# Altium PCB PCB_幻彩灯带_2021-05-29.pcbdoc
Units mil, origin at the board's own origin, x right, y up, seen from the top; angles counter-clockwise.
Board outline 4440.49 x 2977.99 mil, 2 copper layers (Top Layer, Bottom Layer); 36 components, 34 nets, 131 pads, 78 vias.
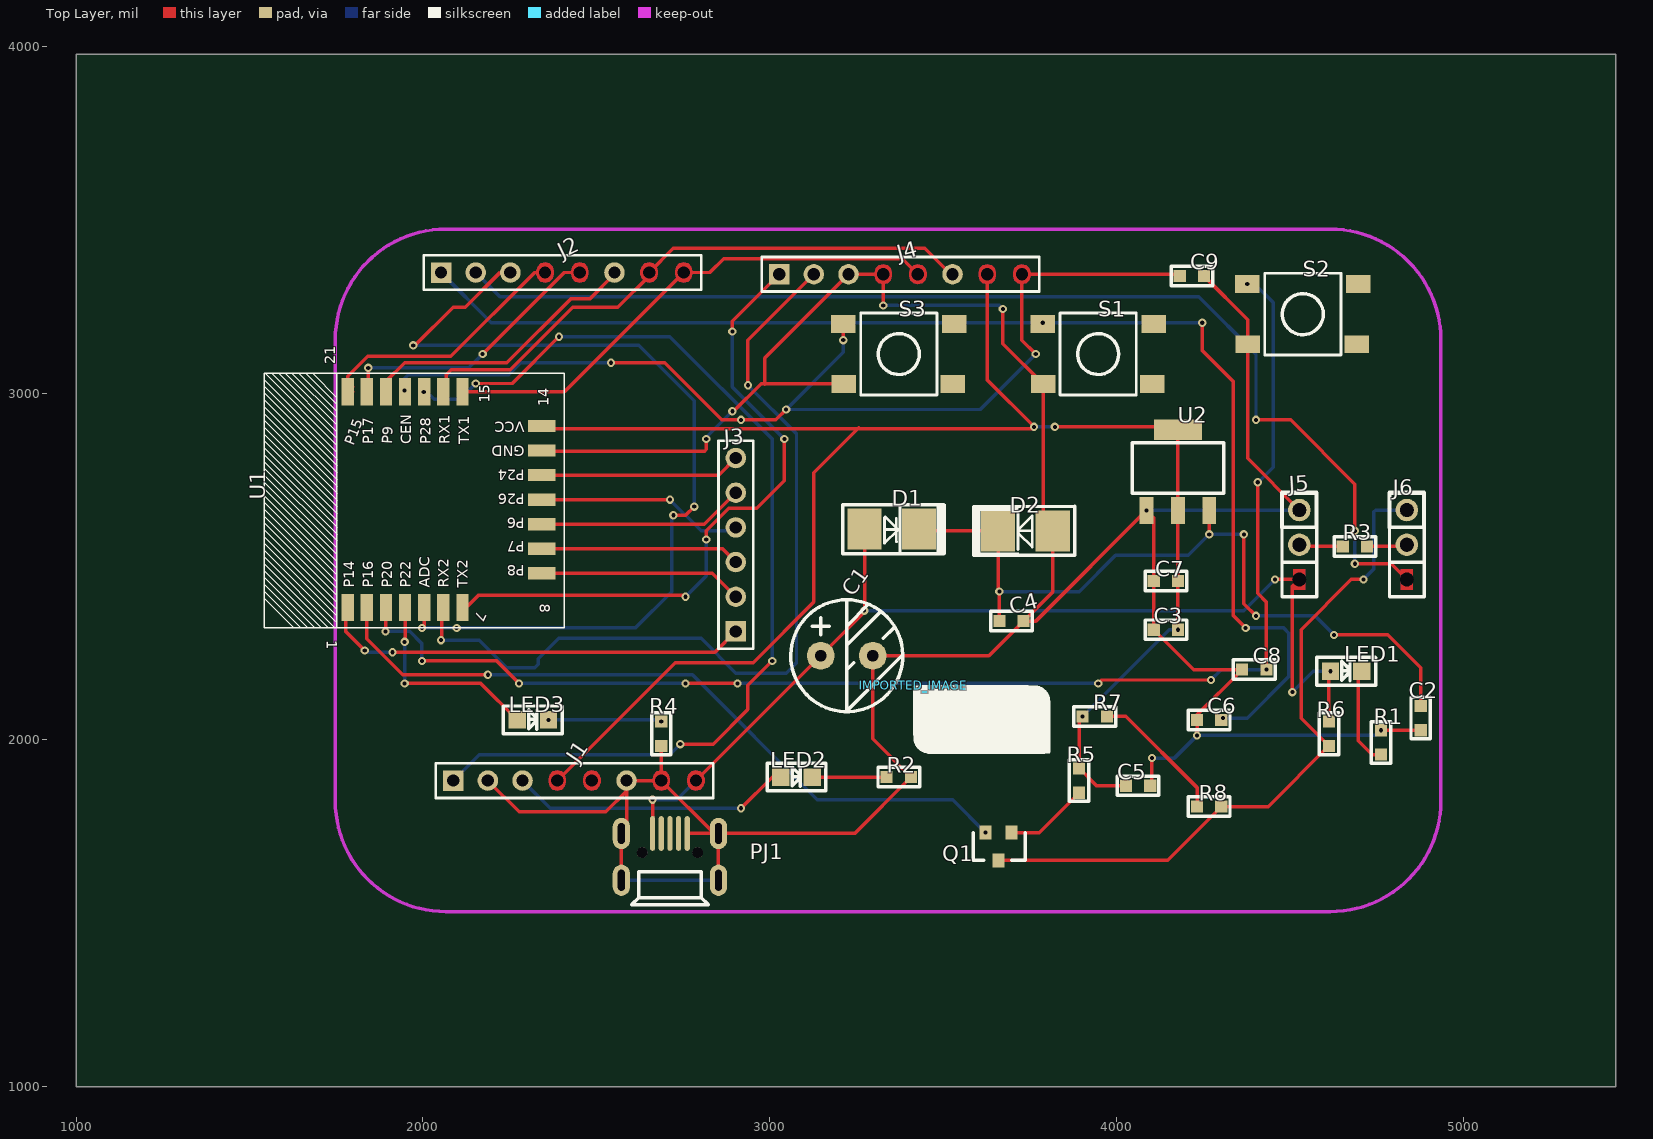
[diagram p0: Top Layer view]
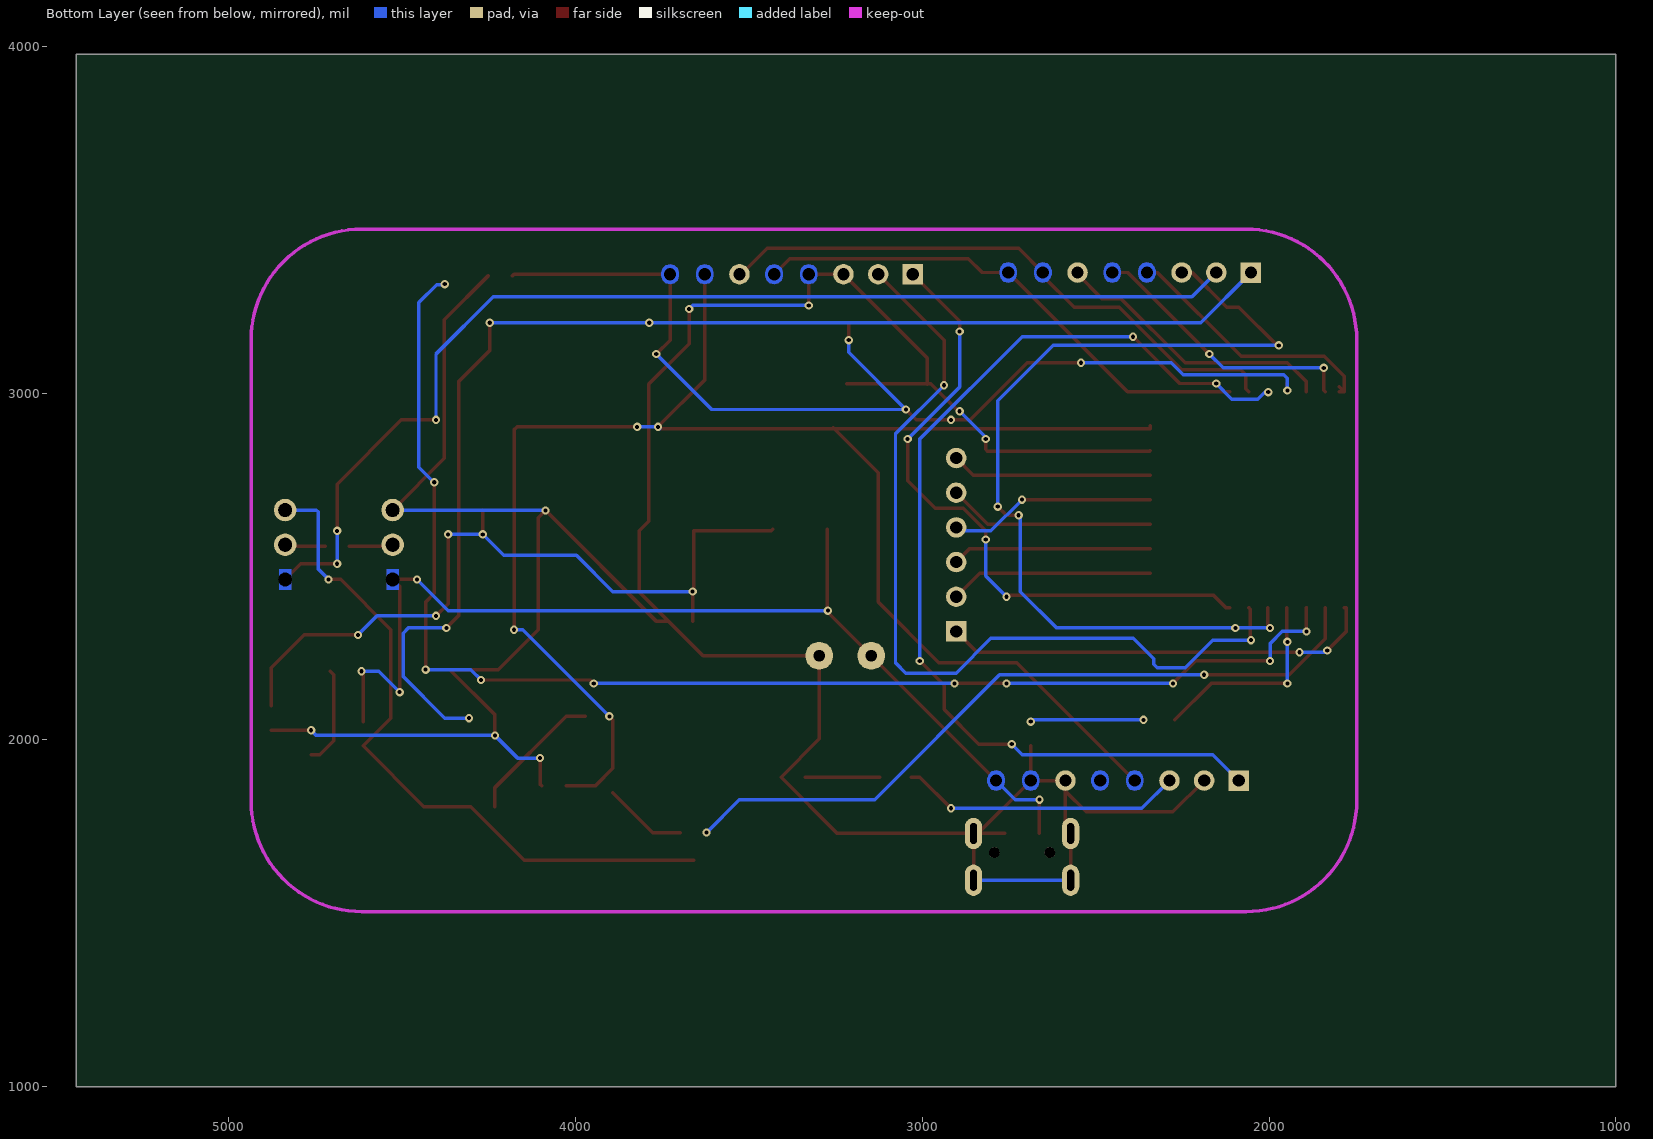
[diagram p1: Bottom Layer view, seen from below]

## Layer stack, top to bottom
Top Layer: signal copper (thickness not stored)
Dielectric: dielectric 12.6, FR-4, Dk 4.8
Bottom Layer: signal copper (thickness not stored)

## Board outline
5440.49,1000 1000,1000 1000,3977.99 5440.49,3977.99

## Components (designator, comment, footprint, x,y, rotation, side; value= is the part's Value field where it differs from the comment)
C1 "220uF±20%/16V" CD0.15 3222.5,2242.99 r0 top
C2 "22uF±20%/16V" C0603 4877.5,2097.99 r270 top
C3 "22uF±20%/16V" C0603 4177.5,2317.99 r180 top
C4 "0.1uF±20%/50V" C0603 3662.5,2342.99 r0 top
C5 "0.1uF±20%/50V" C0603 4027.5,1867.99 r0 top
C6 "0.1uF±20%/16V" C0603 4232.5,2057.99 r0 top
C7 "0.1uF±20%/16V" C0603 4107.5,2457.99 r0 top
C8 "0.1uF±20%/16V" C0603 4362.5,2202.99 r0 top
C9 "0.1uF±20%/16V" C0603 4182.5,3337.99 r0 top
D1 "SS210" SMA(DO-214AC) 3352.5,2607.99 r0 top
D2 "SMBJ05CA" SMB(DO-214AA) 3737.5,2602.99 r180 top
IMPORTED_IMAGE "IMPORTED_IMAGE" IMPORTED_IMAGE 3414.6,2157.49 r0 top
J1 "CON8" HDR1X8Z 2087.5,1882.99 r0 top
J2 "CON8" HDR1X8Z 2052.5,3347.99 r0 top
J3 "CON6" HDR1X6Z 2902.5,2312.99 r90 top
J4 "CON8" HDR1X8Z 3027.5,3342.99 r0 top
J5 "KF301-3P" "SIP3 - 2.54" 4527.5,2462.99 r90 top
J6 "KF301-3P" "SIP3 - 2.54" 4837.5,2462.99 r90 top
LED1 "LED" LED0805_1 4617.5,2197.99 r0 top
LED2 "LED" LED0805_1 3032.5,1892.99 r0 top
LED3 "LED" LED0805_1 2272.5,2057.99 r0 top
PJ1 "MCR_USB" MICRO_USB-NEW-16.12.12 2712.5,1662.99 r180 top
Q1 "S8050" SOT-23-NPN 3697.5,1732.99 r180 top
R1 "1R±5%" R0603 4762.5,1957.99 r90 top
R2 "1K±5%" R0603 3407.5,1892.99 r180 top
R3 "1R±5%" R0603 4722.5,2557.99 r180 top
R4 "1K±5%" R0603 2687.5,2052.99 r270 top
R5 "2K±5%" R0603 3892.5,1917.99 r270 top
R6 "2K±5%" R0603 4612.5,2052.99 r270 top
R7 "2K±5%" R0603 3902.5,2067.99 r0 top
R8 "NC/0R" R0603 4232.5,1807.99 r0 top
S1 "KEY_SW2" KEY4-SMD 3947.5,3112.99 r0 top
S2 "KEY_SW2" KEY4-SMD 4537.5,3227.99 r0 top
S3 "KEY_SW2" KEY4-SMD 3372.5,3112.99 r0 top
U1 "WIFI_BLE_CBU" WIFI_BLE_CBU 2342.5,2692.99 r90 top
U2 "GM1117-3.3ST3T" SOT-223 4177.5,2777.99 r0 top

## Footprints (in the part's own frame and the unit in brackets; to place one, negate y for a bottom-side part, rotate by r counter-clockwise, add the part's x,y. Pads: shape width x height; smd on the part's side, far side on the other; paste and mask are expansions set on the pad)
C0603 [mil]
  rect 35x35 smd: 1(0,0) 2(70,0)
  silkscreen extent -25,-28 95,28
CD0.15 [mil]
  round 80 hole 32 slot 32.2 at 0 deg: 1(-75,0) 2(75,0)
  silkscreen extent -161,-161 161,161
HDR1X6Z [mm]
  rect 1.5x1.5 hole 0.9: 1(0,0)
  round 1.5 hole 0.9: 2(2.54,0) 3(5.08,0) 4(7.62,0) 5(10.16,0) 6(12.7,0)
  silkscreen extent -1.27,-1.27 13.97,1.27
HDR1X8Z [mm]
  rect 1.5x1.5 hole 0.9: 1(0,0)
  round 1.5 hole 0.9: 2(2.54,0) 3(5.08,0) 6(12.7,0)
  round 0 hole 0.9: 4(7.62,0) 5(10.16,0) 7(15.24,0) 8(17.78,0)
  Top Layer region: 18.415,-0.115 18.33,-0.433 18.097,-0.665 17.78,-0.75 17.462,-0.665 17.23,-0.433 17.145,-0.115 17.145,0.115 17.23,0.432 17.462,0.665 17.78,0.75 18.097,0.665 18.33,0.432 18.415,0.115
  Top Layer region: 15.875,-0.115 15.79,-0.433 15.557,-0.665 15.24,-0.75 14.922,-0.665 14.69,-0.433 14.605,-0.115 14.605,0.115 14.69,0.432 14.922,0.665 15.24,0.75 15.557,0.665 15.79,0.432 15.875,0.115
  Top Layer region: 10.795,-0.115 10.71,-0.433 10.477,-0.665 10.16,-0.75 9.842,-0.665 9.61,-0.433 9.525,-0.115 9.525,0.115 9.61,0.432 9.842,0.665 10.16,0.75 10.477,0.665 10.71,0.432 10.795,0.115
  Top Layer region: 8.255,-0.115 8.17,-0.433 7.937,-0.665 7.62,-0.75 7.302,-0.665 7.07,-0.433 6.985,-0.115 6.985,0.115 7.07,0.432 7.302,0.665 7.62,0.75 7.937,0.665 8.17,0.432 8.255,0.115
  Bottom Layer region: 18.415,-0.115 18.33,-0.433 18.097,-0.665 17.78,-0.75 17.462,-0.665 17.23,-0.433 17.145,-0.115 17.145,0.115 17.23,0.432 17.462,0.665 17.78,0.75 18.097,0.665 18.33,0.432 18.415,0.115
  Bottom Layer region: 15.875,-0.115 15.79,-0.433 15.557,-0.665 15.24,-0.75 14.922,-0.665 14.69,-0.433 14.605,-0.115 14.605,0.115 14.69,0.432 14.922,0.665 15.24,0.75 15.557,0.665 15.79,0.432 15.875,0.115
  Bottom Layer region: 10.795,-0.115 10.71,-0.433 10.477,-0.665 10.16,-0.75 9.842,-0.665 9.61,-0.433 9.525,-0.115 9.525,0.115 9.61,0.432 9.842,0.665 10.16,0.75 10.477,0.665 10.71,0.432 10.795,0.115
  Bottom Layer region: 8.255,-0.115 8.17,-0.433 7.937,-0.665 7.62,-0.75 7.302,-0.665 7.07,-0.433 6.985,-0.115 6.985,0.115 7.07,0.432 7.302,0.665 7.62,0.75 7.937,0.665 8.17,0.432 8.255,0.115
  silkscreen extent -1.27,-1.27 19.05,1.27
IMPORTED_IMAGE [mil]
  silkscreen extent 0,-197 395,0
KEY4-SMD [mm]
  rect 1.8x1.3 smd: 1(-4.035,-2.2) 2(-4.065,2.2) 3(4.065,2.2) 4(3.965,-2.2)
  silkscreen extent -2.79,-3 2.79,3
LED0805_1 [mil]
  rect 50x50 smd: 1(0,0) 2(90,0)
  silkscreen extent -40,-40 130,40
MICRO_USB-NEW-16.12.12 [mil]
  oval 15x100 smd: 1(-50,-67.5) 2(-25,-67.5) 3(0,-67.5) 4(25,-67.5) 5(50,-67.5)
  oval 50x90 hole 20 slot 60 at 90 deg: 6(-140,-67.5) 7(-140,67.5) 8(140,67.5) 9(140,-67.5)
  round 30 hole 30 slot 30.2 at 0 deg unplated: ""(-80,-12.5) ""(80,-12.5)
  silkscreen extent -110,42 110,138
R0603 [mil]
  rect 35x35 smd: 1(0,0) 2(70,0)
  silkscreen extent -25,-28 95,28
"SIP3 - 2.54" [mil]
  round 0 hole 39.37 slot 39.57 at 90 deg: 1(0,0)
  round 65 hole 39.37 slot 39.57 at 0 deg: 2(100,0) 3(200,0)
  Top Layer region: 30.03,17.44 -30.03,17.44 -30.03,-17.44 30.03,-17.44
  Bottom Layer region: 30.03,17.44 -30.03,17.44 -30.03,-17.44 30.03,-17.44
  silkscreen extent -50,-50 250,50
SMA(DO-214AC) [mm]
  rect 2.5x3 smd: 1(-2,0) 2(2,0)
  silkscreen extent -3.6,-1.84 3.94,1.83
SMB(DO-214AA) [mm]
  rect 2.5x3 smd: 1(-2,0) 2(2,0)
  silkscreen extent -3.6,-1.8 3.91,1.82
SOT-23-NPN [mil]
  rect 35x40 smd: 1(75,0) 2(0,0) 3(38,80)
  silkscreen extent -40,0 110,80
SOT-223 [mm]
  rect 1x2 smd: 1(-2.3,-2.95) 2(0,-2.95) 3(2.3,-2.95)
  rect 3.5x1.5 smd: 2(0,2.95)
  silkscreen extent -3.35,-1.71 3.35,1.99
WIFI_BLE_CBU [mm]
  rect 2x0.9 smd: 1(-7.9,14.2) 2(-7.9,12.8) 3(-7.9,11.4) 4(-7.9,10) 5(-7.9,8.6) 6(-7.9,7.2) 7(-7.9,5.8) 15(7.9,5.8) 16(7.9,7.2) 17(7.9,8.6) 18(7.9,10) 19(7.9,11.4) 20(7.9,12.8) 21(7.9,14.2)
  rect 0.9x2 smd: 8(-5.4,0) 9(-3.6,0) 10(-1.8,0) 11(0,0) 12(1.8,0) 13(3.6,0) 14(5.4,0)
  silkscreen extent -9.4,-1.65 9.28,20.33

## Via types
v1: diameter 24, hole 12, Top Layer to Bottom Layer, 78 vias

## Nets (pads, with @x,y where several pads share a name; then routed paths per layer and width w, separated by ;. In a path a pad name is that pad's centre, name@x,y a point inside that pad or via, vN(x,y) a via of type N, cw(c..) or ccw(c..) an arc to the next point about the centre after c; other vN are vias at no path point)
+3.3V: C3.1 C5.1 C7.2 J1.4 J4.7 R5.1 R7.1 U1.14 U2.2 | length 5128.5
  Top Layer w10: U1.14 2342.5,2897.99 3762.5,2897.99 v1(3762.5,2902.99) 3627.5,3037.99 J4.7 ; J1.4 2727.5,2222.99 2952.5,2222.99 3127.5,2397.99 3127.5,2770.79 3257.3,2900.59 ; v1(3822.5,2902.99) 4168.64,2902.99 4177.5,2894.13 4177.5,2661.85 C7.2 v1(4177.5,2317.99) ; v1(3902.5,2067.99) 3892.5,2057.99 R5.1 3942.5,1867.99 C5.1
  Bottom Layer w10: v1@3757.5,2897.99 v1(3762.5,2902.99) v1(3822.5,2902.99) ; v1(3902.5,2067.99) 4152.5,2317.99 v1(4177.5,2317.99)
+5V: C1.1 D1.1 J1.8 J5.1 LED1.1 PJ1.5 R6.1 | length 3074.2
  Top Layer w10: PJ1.5 v1(2662.5,1827.99) ; v1(2787.5,1882.99) C1.1 3273.76,2369.25 D1.1 ; v1(4457.5,2462.99) J5.1 4507.5,2442.99 v1(4507.5,2137.99) ; R6.1 4612.5,2192.99 v1(4617.5,2197.99)
  Bottom Layer w10: v1(2662.5,1827.99) 2732.5,1827.99 v1(2787.5,1882.99) ; v1(3272.5,2372.99) 4367.5,2372.99 v1(4457.5,2462.99) ; v1(4507.5,2137.99) 4567.5,2197.99 v1@4612.5,2197.99
ADC: J2.3 U1.5 | length 2665.8
  Top Layer w10: v1(1972.5,3137.99) 1977.5,3137.99 2087.5,3247.99 2122.5,3247.99 2222.5,3347.99 J2.3 ; v1(1997.5,2322.99) 2003.92,2329.41 U1.5 ; v1(2722.5,2647.99) 2757.5,2647.99 v1(2782.5,2672.99)
  Bottom Layer w10: v1(1972.5,3137.99) 2622.5,3137.99 2782.5,2977.99 v1(2782.5,2672.99) ; v1(1997.5,2322.99) v1(2097.5,2322.99) 2612.5,2322.99 2717.5,2427.99 2717.5,2642.99 v1(2722.5,2647.99)
D1_2: C2.1 C4.1 D1.2 D2.2 U2.3 | length 2230.2
  Top Layer w10: D1.2 3436.24,2602.99 D2.2 3658.76,2431.73 v1(3662.5,2427.99) C4.1 ; v1(4267.5,2592.99) 4268.05,2593.54 U2.3@4268.05,2661.85 ; v1(4367.5,2592.99) 4367.5,2392.99 v1(4402.5,2357.99) ; v1(4627.5,2302.99) 4782.5,2302.99 4877.5,2207.99 C2.1
  Bottom Layer w10: v1(3662.5,2427.99) 3892.5,2427.99 3997.5,2532.99 4207.5,2532.99 v1(4267.5,2592.99) v1(4367.5,2592.99) ; v1(4402.5,2357.99) 4572.5,2357.99 v1(4627.5,2302.99)
GND: C1.2 C2.2 C3.2 C4.2 C5.2 C6.1 C7.1 C8.1 C9.2 D2.1 J1.2 J1.6 J1.7 J4.3 J4.4 J5.3 PJ1.1 PJ1.6 PJ1.7 PJ1.8 PJ1.9 R1.2 R2.1 R4.2 S1.1 S2.1 S3.1 U1.13 U2.1 | length 9641.3
  Top Layer w10: J1.2 2277.5,1792.99 2527.5,1792.99 2587.5,1852.99 J1.6 ; U1.13 2344.23,2832.99 2812.5,2832.99 2817.5,2837.99 v1(2817.5,2867.99) ; v1(2572.5,1595.49) PJ1.9 2587.5,1745.49 J1.6 ; R4.2 J1.7 ; PJ1.1 PJ1.6 ; v1(2852.5,1595.49) PJ1.6 ; v1@2896.93,2948.8 2975.32,3027.19 S3.1@3218.07,3027.19 ; 2985.89,3026.38 2985.89,3101.38 J4.3 J4.4 v1(3327.5,3252.99) ; v1(3672.5,3242.99) 3672.5,3142.52 S1.1 3788.64,2630.59 D2.1 3816.24,2426.73 C4.2 ; v1(4086.9,2661.89) 3768,2342.99 C4.2 ; v1(4086.9,2661.89) 4107.5,2641.3 C7.1 C3.2 4222.5,2202.99 C8.1 4232.5,2072.99 C6.1 v1(4232.5,2012.99) ; C5.2 4102.5,1872.99 v1(4102.5,1947.99) ; C9.2 4378.64,3211.85 S2.1 4378.64,2811.85 J5.3 ; v1(4762.5,2027.99) C2.2 ; J1.6 J1.7 ; J1.7 2840,1730.49 PJ1.6 ; PJ1.6 3245,1730.49 R2.1 3297.5,2002.99 C1.2 3632.5,2242.99 C4.2
  Bottom Layer w10: v1(2572.5,1595.49) v1(2852.5,1595.49) ; v1(2817.5,2867.99) 2817.5,2872.99 v1(2892.5,2947.99) ; v1(3327.5,3252.99) 3662.5,3252.99 v1(3672.5,3242.99) ; v1(4086.9,2661.89) 4088,2662.99 J5.3 ; v1(4102.5,1947.99) 4167.5,1947.99 v1(4232.5,2012.99) 4747.5,2012.99 v1(4762.5,2027.99)
J1_3: J1.3 LED2.1 | length 815.4
  Top Layer w10: v1(2917.5,1802.99) 3007.5,1892.99 LED2.1
  Bottom Layer w10: v1(2287.5,1882.99) 2367.5,1802.99 v1(2917.5,1802.99)
J2_1: C6.2 J2.1 S1.2 | length 3682.8
  Top Layer w10: v1(4247.5,3202.99) 4247.5,3122.99 4337.5,3032.99 4337.5,2357.99 v1(4372.5,2322.99)
  Bottom Layer w10: J2.1 2197.5,3202.99 v1(3787.5,3202.99) v1(4247.5,3202.99) ; v1(4307.5,2062.99) 4377.5,2062.99 4497.5,2182.99 4497.5,2307.99 4482.5,2322.99 v1(4372.5,2322.99)
LED1_2: LED1.2 R1.1 | length 285.7
  Top Layer w10: LED1.2 4697.5,2187.99 4697.5,1997.99 4737.5,1957.99 R1.1
LED2_2: LED2.2 R2.2 | length 215
  Top Layer w10: LED2.2 R2.2
LED3_2: LED3.2 R4.1 | length 327.1
  Bottom Layer w10: v1(2362.5,2057.99) 2682.5,2057.99 v1(2687.5,2052.99)
OUT_DATA: Q1.1 U1.2 | length 2105.5
  Top Layer w10: U1.2 1838.56,2291.93 1942.5,2187.99 v1(2187.5,2187.99)
  Bottom Layer w10: v1(2187.5,2187.99) 2777.5,2187.99 3137.5,1827.99 3527.5,1827.99 v1(3622.5,1732.99)
OUT_RGB: J6.2 R3.1 | length 117.1
  Top Layer w10: R3.1 4832.5,2557.99 J6.2
OUT_RGB_ARD: J2.2 J6.1 | length 3297.6
  Top Layer w10: v1(4402.5,2922.99) 4502.5,2922.99 4687.5,2737.99 v1(4687.5,2602.99) ; v1(4687.5,2507.99) 4792.5,2507.99 J6.1
  Bottom Layer w10: J2.2 2222.5,3277.99 4237.5,3277.99 4402.5,3112.99 v1(4402.5,2922.99) ; v1(4687.5,2507.99) v1(4687.5,2602.99)
OUT_RGB_CBU: J6.3 Q1.3 R6.2 R8.2 | length 2002.4
  Top Layer w10: Q1.3 4147.5,1652.99 R8.2 4437.5,1807.99 R6.2 4532.5,2062.99 4532.5,2317.99 4677.5,2462.99 v1(4712.5,2462.99)
  Bottom Layer w10: v1(4712.5,2462.99) 4742.5,2492.99 4742.5,2657.99 4747.5,2662.99 J6.3
P6: J3.5 U1.10 | length 597.6
  Top Layer w10: U1.10 2811.63,2622.12 J3.5
P6_KEY1: C8.2 S2.2 U1.3 | length 3902.8
  Top Layer w10: v1(1892.5,2312.99) 1892.5,2380.79 U1.3 ; v1(1997.5,2227.99) 2212.5,2227.99 v1(2277.5,2162.99) ; v1(2757.5,2162.99) v1(2907.5,2162.99) ; v1(3947.5,2162.99) 3957.5,2172.99 v1(4272.5,2172.99) ; v1(4407.5,2742.99) 4407.5,2422.99 4432.5,2397.99 v1(4432.5,2202.99)
  Bottom Layer w10: v1(1892.5,2312.99) 1962.5,2312.99 1997.5,2277.99 v1(1997.5,2227.99) ; v1(2277.5,2162.99) v1(2757.5,2162.99) ; v1(2907.5,2162.99) v1(3947.5,2162.99) ; v1(4272.5,2172.99) 4302.5,2202.99 v1(4432.5,2202.99) ; v1@4377.5,3312.99 4400.9,3312.99 4452.5,3261.39 4452.5,2786.39 v1@4407.5,2741.39
  other v1: 4377.46,3314.6
P7: J3.3 U1.9 | length 575.9
  Top Layer w10: U1.9 2864.23,2551.26 J3.3
P8: J3.2 U1.8 | length 587.9
  Top Layer w10: U1.8 2835.1,2480.39 J3.2
P9: J2.6 U1.19 | length 821.9
  Top Layer w10: U1.19 1893.7,3034.19 1947.5,3087.99 2242.5,3087.99 2427.5,3272.99 2482.5,3272.99 2552.5,3342.99 J2.6
P14: J3.1 U1.1 | length 1248.4
  Top Layer w10: U1.1 1778.4,2381.97 1778.4,2312.09 v1(1832.5,2257.99) ; v1(1912.5,2252.99) 2842.5,2252.99 J3.1
  Bottom Layer w10: v1(1832.5,2257.99) 1837.5,2252.99 v1(1912.5,2252.99)
P15: J2.4 U1.21 | length 771.8
  Top Layer w10: U1.21 1783.4,3048.89 1840.8,3106.29 2080.8,3106.29 2322.5,3347.99 J2.4 ; U1.21@1797.48,3004.01 U1.21 U1.21@1797.5,3018.07
P17: J2.5 U1.20 | length 794.5
  Top Layer w10: U1.20 1842.5,3007.95 v1(1842.5,3072.99) ; v1(2172.5,3112.99) 2407.5,3347.99 J2.5
  Bottom Layer w10: v1(1842.5,3072.99) 2132.5,3072.99 v1(2172.5,3112.99)
P22: LED3.1 U1.4 | length 588
  Top Layer w10: v1(1947.5,2162.99) 2167.5,2162.99 LED3.1 ; v1(1947.5,2282.99) 1948.8,2284.29 U1.4
  Bottom Layer w10: v1(1947.5,2162.99) v1(1947.5,2282.99)
P24: J3.6 U1.12 | length 580.4
  Top Layer w10: U1.12 2853.37,2763.86 J3.6
P26: J3.4 U1.11 | length 607.3
  Top Layer w10: U1.11 v1(2712.5,2692.99)
  Bottom Layer w10: v1(2712.5,2692.99) 2802.5,2602.99 2902.5,2602.99 J3.4
P28: J1.1 U1.17 | length 2953.9
  Top Layer w10: v1(2152.5,3027.99) 2257.5,3027.99 v1(2392.5,3162.99) ; v1(2742.5,1987.99) 2837.5,1987.99 2937.5,2087.99 2937.5,2157.99 v1(3007.5,2227.99)
  Bottom Layer w10: v1(2002.5,3002.99) 2012.5,3002.99 2032.5,2982.99 2107.5,2982.99 v1(2152.5,3027.99) ; J1.1 2162.5,1957.99 2712.5,1957.99 v1(2742.5,1987.99) ; v1(2392.5,3162.99) 2712.5,3162.99 3007.5,2867.99 v1(3007.5,2227.99)
Q1_2: Q1.2 R5.2 | length 242.6
  Top Layer w10: Q1.2 3777.5,1732.99 R5.2
R3_2: J5.2 R3.2 | length 127.1
  Top Layer w10: J5.2 4532.5,2557.99 R3.2
R7_2: R7.2 R8.1 | length 399.9
  Top Layer w10: R7.2 4027.5,2067.99 4232.5,1862.99 R8.1
RST: C9.1 J4.8 S3.2 U1.18 | length 3063.3
  Top Layer w10: U1.18 U1.18@1948.8,3027.99 ; v1(2542.5,3087.99) 2697.5,3087.99 2862.5,2922.99 v1(2917.5,2922.99) 3017.5,2922.99 v1(3047.5,2952.99) ; v1(3212.5,3152.99) S3.2 ; v1(3767.5,3112.99) 3727.5,3152.99 J4.8 4177.5,3342.99 C9.1
  Bottom Layer w10: v1(1947.5,3007.99) 1947.5,3042.99 1957.5,3052.99 2247.5,3052.99 2282.5,3087.99 v1(2542.5,3087.99) ; v1(3212.5,3152.99) 3212.5,3117.99 v1(3047.5,2952.99) 3607.5,2952.99 v1(3767.5,3112.99)
RX2: J4.2 U1.6 | length 2509.8
  Top Layer w10: v1(2052.5,2287.99) 2054.04,2289.53 2054.04,2376.97 U1.6 ; v1(2937.5,3022.99) 2937.5,3152.99 J4.2
  Bottom Layer w10: v1(2052.5,2287.99) 2162.5,2287.99 2242.5,2207.99 2322.5,2207.99 2332.5,2217.99 2332.5,2233.72 2391.78,2292.99 2802.5,2292.99 2902.5,2192.99 3047.5,2192.99 3077.5,2222.99 3077.5,2882.99 v1(2937.5,3022.99)
TX2: J4.1 U1.7 | length 1876.2
  Top Layer w10: U1.7 2124.78,2381.97 2160.8,2417.99 2757.5,2417.99 v1(2757.5,2412.99) ; v1(2817.5,2577.99) 2817.5,2602.99 2882.5,2667.99 2962.5,2667.99 3042.5,2747.99 v1(3042.5,2867.99) ; v1(2892.5,3177.99) 2892.5,3207.99 J4.1
  Bottom Layer w10: v1(2757.5,2412.99) 2817.5,2472.99 v1(2817.5,2577.99) ; v1(2892.5,3177.99) 2892.5,3017.99 v1(3042.5,2867.99)
WRX: J2.7 J4.6 U1.16 | length 1700.6
  Top Layer w10: U1.16 2067.5,3012.47 2067.5,3052.99 2082.5,3067.99 2252.5,3067.99 2432.5,3247.99 2562.5,3247.99 2652.5,3337.99 J2.7 2722.5,3417.99 3447.5,3417.99 3522.5,3342.99 J4.6
WTX: J2.8 J4.5 U1.15 | length 1491
  Top Layer w10: U1.15 2408.52,3004.01 J2.8 2827.5,3347.99 2867.5,3387.99 3382.5,3387.99 J4.5
pads on no net: J1.5 PJ1. PJ1.2 PJ1.3 PJ1.4 S1.3 S1.4 S2.3 S2.4 S3.3 S3.4

## Keep-outs
Keep-Out Layer:
  lines w10: 1747.5,1823.82 ccw(c2066.32,1823.82) 2066.32,1505 ; 1747.5,3154.17 cw(c2066.32,3154.17) 2066.32,3472.99 ; 4616.67,1505 ccw(c4616.67,1823.82) 4935.49,1823.82 ; 4616.67,3472.99 cw(c4616.67,3154.17) 4935.49,3154.17

## Silkscreen, mask and mechanical layers (free items; w line width, h text height)
Document:
  lines w0.1: 3219.25,2488 3221.25,2490

## Text inside footprints (layer, text, board x,y; h text height)
U1: Top Overlay "15" at 2192.5,2972.99 h30 r90; Top Overlay "14" at 2362.5,2962.99 h30 r90; Top Overlay "8" at 2337.5,2392.99 h30 r270; Top Overlay "7" at 2158.91,2374.33 h30 r245; Top Overlay "P8" at 2293.5,2503.99 h30 r180; Top Overlay "P7" at 2293.5,2572.99 h30 r180; Top Overlay "P6" at 2293.5,2641.53 h30 r180; Top Overlay "P26" at 2293.5,2710.36 h30 r180; Top Overlay "P24" at 2293.5,2779.36 h30 r180; Top Overlay "1" at 1722.5,2287.99 h30 r270; Top Overlay "21" at 1747.5,3082.99 h30 r90; Top Overlay "P14" at 1802.34,2438.99 h30 r90; Top Overlay "P16" at 1857.4,2438.99 h30 r90; Top Overlay "P20" at 1911.18,2438.99 h30 r90; Top Overlay "P22" at 1965.6,2438.99 h30 r90; Top Overlay "ADC" at 2020.03,2438.99 h30 r90; Top Overlay "RX2" at 2074.45,2438.99 h30 r90; Top Overlay "TX2" at 2129.5,2438.99 h30 r90; Top Overlay "VCC" at 2293.44,2917.99 h30 r180; Top Overlay "GND" at 2293.5,2848.99 h30 r180; Top Overlay "TX1" at 2133.5,2853.06 h30 r90; Top Overlay "RX1" at 2078.27,2853.06 h30 r90; Top Overlay "P28" at 2022.41,2853.06 h30 r90; Top Overlay "CEN" at 1967.18,2853.06 h30 r90; Top Overlay "P9" at 1911.94,2852.28 h30 r87; Top Overlay "P17" at 1857.36,2853.06 h30 r90; Top Overlay "P15" at 1800.5,2847.69 h30 r69